# Altium PCB Tigershark 3D R1.1.PcbDoc (part 3 of 3)
Units mil, origin at the board's own origin, x right, y up, seen from the top; angles counter-clockwise.
Board outline 6000 x 4500 mil, 4 copper layers (Top Layer, Groun Plane, Power Plane, Bottom Layer); 257 components, 247 nets, 1024 pads, 791 vias.
Unrouted connection lines stored in the file: 159.
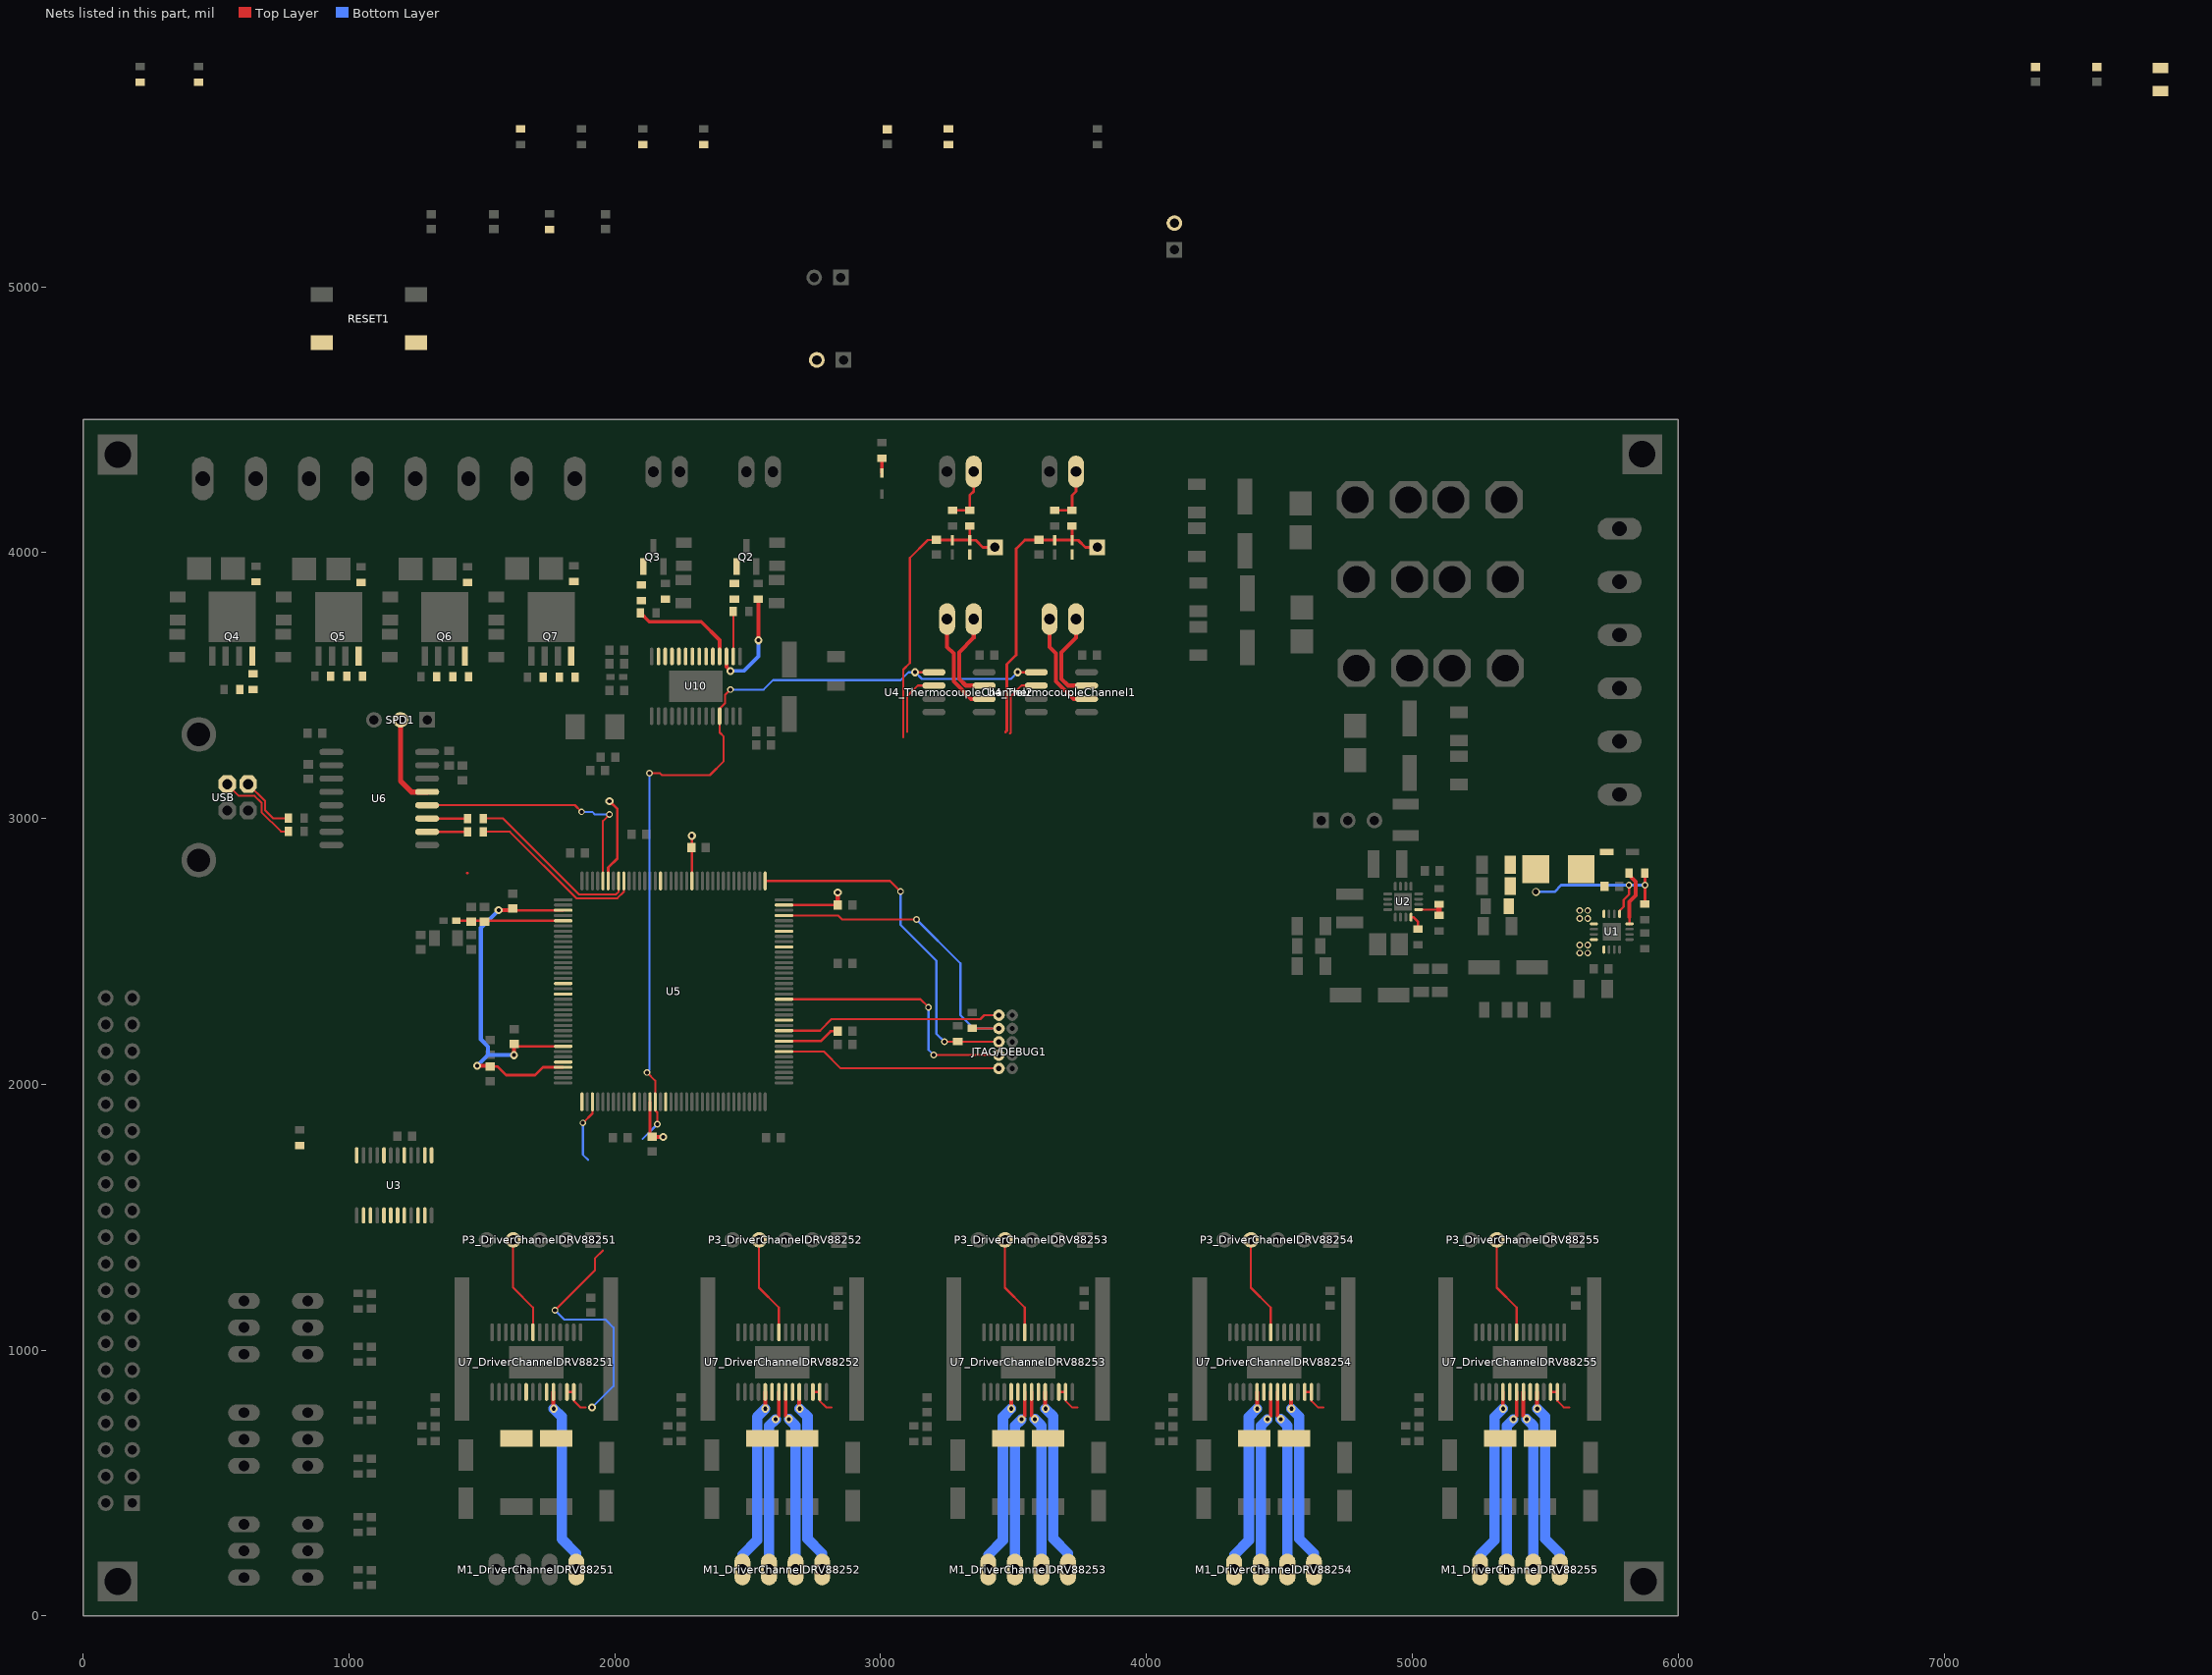
[diagram p5: the nets of this part, all layers, seen from the top]

## Via types
v1: diameter 30, hole 15, Top Layer to Bottom Layer, 501 vias
v2: diameter 25, hole 15, Top Layer to Bottom Layer, 177 vias
v3: diameter 19.68, hole 7.87, Top Layer to Bottom Layer, 90 vias
v4: diameter 50, hole 20, Top Layer to Bottom Layer, 19 vias
v5: diameter 30, hole 20, Top Layer to Bottom Layer, 3 vias
v6: diameter 50, hole 28, Top Layer to Bottom Layer, 1 vias

## Nets (pads, with @x,y where several pads share a name; then routed paths per layer and width w, separated by ;. In a path a pad name is that pad's centre, name@x,y a point inside that pad or via, vN(x,y) a via of type N, cw(c..) or ccw(c..) an arc to the next point about the centre after c; other vN are vias at no path point) (continued)
NetM1_DriverChannelDRV88251_4: M1_DriverChannelDRV88251.4 U7_DriverChannelDRV88251.10 | length 700
  Top Layer w14: v1@1768.98,782.98 U7_DriverChannelDRV88251.10@1768.98,842.8
  Bottom Layer w39: v1(1770,780) 1800,750 1800,290 1855,235 M1_DriverChannelDRV88251.4@1855,175
NetM1_DriverChannelDRV88252_1: M1_DriverChannelDRV88252.1 U7_DriverChannelDRV88252.5 | length 703.4
  Top Layer w14: v1(2566.02,780) U7_DriverChannelDRV88252.5@2566.02,842.8
  Bottom Layer w39: M1_DriverChannelDRV88252.1@2480,175 2480,230 2535,285 2535,748.98 v1(2566.02,780)
NetM1_DriverChannelDRV88252_2: M1_DriverChannelDRV88252.2 U7_DriverChannelDRV88252.7 | length 683.2
  Top Layer w14: v1(2605,740) 2617.2,752.2 U7_DriverChannelDRV88252.7@2617.2,842.8
  Bottom Layer w39: M1_DriverChannelDRV88252.2@2580,175 2580,715 v1(2605,740)
NetM1_DriverChannelDRV88252_3: M1_DriverChannelDRV88252.3 U7_DriverChannelDRV88252.8 | length 665.9
  Top Layer w14: 2642.8,753.23 U7_DriverChannelDRV88252.8@2642.8,842.8
  Bottom Layer w39: v1(2655,741.02) 2680,716.02 M1_DriverChannelDRV88252.3@2680,175
NetM1_DriverChannelDRV88252_4: M1_DriverChannelDRV88252.4 U7_DriverChannelDRV88252.10 | length 700
  Top Layer w14: v1@2693.98,782.98 U7_DriverChannelDRV88252.10@2693.98,842.8
  Bottom Layer w39: v1(2695,780) 2725,750 2725,290 2780,235 M1_DriverChannelDRV88252.4@2780,175
NetM1_DriverChannelDRV88253_1: M1_DriverChannelDRV88253.1 U7_DriverChannelDRV88253.5 | length 703.4
  Top Layer w14: v1(3491.02,780) U7_DriverChannelDRV88253.5@3491.02,842.8
  Bottom Layer w39: M1_DriverChannelDRV88253.1@3405,175 3405,230 3460,285 3460,748.98 v1(3491.02,780)
NetM1_DriverChannelDRV88253_2: M1_DriverChannelDRV88253.2 U7_DriverChannelDRV88253.7 | length 683.2
  Top Layer w14: v1(3530,740) 3542.2,752.2 U7_DriverChannelDRV88253.7@3542.2,842.8
  Bottom Layer w39: M1_DriverChannelDRV88253.2@3505,175 3505,715 v1(3530,740)
NetM1_DriverChannelDRV88253_3: M1_DriverChannelDRV88253.3 U7_DriverChannelDRV88253.8 | length 665.9
  Top Layer w14: 3567.8,753.23 U7_DriverChannelDRV88253.8@3567.8,842.8
  Bottom Layer w39: v1(3580,741.02) 3605,716.02 M1_DriverChannelDRV88253.3@3605,175
NetM1_DriverChannelDRV88253_4: M1_DriverChannelDRV88253.4 U7_DriverChannelDRV88253.10 | length 700
  Top Layer w14: v1@3618.98,782.98 U7_DriverChannelDRV88253.10@3618.98,842.8
  Bottom Layer w39: v1(3620,780) 3650,750 3650,290 3705,235 M1_DriverChannelDRV88253.4@3705,175
NetM1_DriverChannelDRV88254_1: M1_DriverChannelDRV88254.1 U7_DriverChannelDRV88254.5 | length 703.4
  Top Layer w14: v1(4416.02,780) U7_DriverChannelDRV88254.5@4416.02,842.8
  Bottom Layer w39: M1_DriverChannelDRV88254.1@4330,175 4330,230 4385,285 4385,748.98 v1(4416.02,780)
NetM1_DriverChannelDRV88254_2: M1_DriverChannelDRV88254.2 U7_DriverChannelDRV88254.7 | length 683.2
  Top Layer w14: v1(4455,740) 4467.2,752.2 U7_DriverChannelDRV88254.7@4467.2,842.8
  Bottom Layer w39: M1_DriverChannelDRV88254.2@4430,175 4430,715 v1(4455,740)
NetM1_DriverChannelDRV88254_3: M1_DriverChannelDRV88254.3 U7_DriverChannelDRV88254.8 | length 665.9
  Top Layer w14: 4492.8,753.23 U7_DriverChannelDRV88254.8@4492.8,842.8
  Bottom Layer w39: v1(4505,741.02) 4530,716.02 M1_DriverChannelDRV88254.3@4530,175
NetM1_DriverChannelDRV88254_4: M1_DriverChannelDRV88254.4 U7_DriverChannelDRV88254.10 | length 700
  Top Layer w14: v1@4543.98,782.98 U7_DriverChannelDRV88254.10@4543.98,842.8
  Bottom Layer w39: v1(4545,780) 4575,750 4575,290 4630,235 M1_DriverChannelDRV88254.4@4630,175
NetM1_DriverChannelDRV88255_1: M1_DriverChannelDRV88255.1 U7_DriverChannelDRV88255.5 | length 703.4
  Top Layer w14: v1(5341.02,780) U7_DriverChannelDRV88255.5@5341.02,842.8
  Bottom Layer w39: M1_DriverChannelDRV88255.1@5255,175 5255,230 5310,285 5310,748.98 v1(5341.02,780)
NetM1_DriverChannelDRV88255_2: M1_DriverChannelDRV88255.2 U7_DriverChannelDRV88255.7 | length 683.2
  Top Layer w14: v1(5380,740) 5392.2,752.2 U7_DriverChannelDRV88255.7@5392.2,842.8
  Bottom Layer w39: M1_DriverChannelDRV88255.2@5355,175 5355,715 v1(5380,740)
NetM1_DriverChannelDRV88255_3: M1_DriverChannelDRV88255.3 U7_DriverChannelDRV88255.8 | length 665.9
  Top Layer w14: 5417.8,753.23 U7_DriverChannelDRV88255.8@5417.8,842.8
  Bottom Layer w39: v1(5430,741.02) 5455,716.02 M1_DriverChannelDRV88255.3@5455,175
NetM1_DriverChannelDRV88255_4: M1_DriverChannelDRV88255.4 U7_DriverChannelDRV88255.10 | length 700
  Top Layer w14: v1@5468.98,782.98 U7_DriverChannelDRV88255.10@5468.98,842.8
  Bottom Layer w39: v1(5470,780) 5500,750 5500,290 5555,235 M1_DriverChannelDRV88255.4@5555,175
NetP2_ThermistorChannel1_1: P2_ThermistorChannel1.1 R13_ThermistorChannel1.1 R14_ThermistorChannel1.2 | length 216.7
  Top Layer w10: R13_ThermistorChannel1.1@3655,4159.53 R14_ThermistorChannel1.2@3720,4159.53 3720,4215 3735,4230 P2_ThermistorChannel1.1@3735,4305
NetP2_ThermistorChannel2_1: P2_ThermistorChannel2.1 R13_ThermistorChannel2.1 R14_ThermistorChannel2.2 | length 216.7
  Top Layer w10: R13_ThermistorChannel2.1@3270,4159.53 R14_ThermistorChannel2.2@3335,4159.53 3335,4215 3350,4230 P2_ThermistorChannel2.1@3350,4305
NetQ2_1: Q2.1 R45.2
NetQ3_1: Q3.1 R52.2
NetQ4_4: Q4.4 R58.2
NetQ5_4: Q5.4 R62.2
NetQ6_4: Q6.4 R66.2
NetQ7_4: Q7.4 R70.2
NetR12_1: R12.1 U2.4 | length 60.4
  Top Layer w10: U2.4@4994.98,2628.75 5003.52,2628.75 5021.45,2610.82 R12.1@5021.45,2584.35
NetR14_1: R14.1 U10.3 | length 402.8
  Top Layer w14: U10.3@2420,3609.41 2420,3570 v1(2435,3555) ; v1(2540,3670) R14.1@2540,3824.41
  Bottom Layer w14: v1(2435,3555) 2485,3555 2540,3610 v1(2540,3670)
NetR15_1: R15.1 R16.1 U5.129
NetR17_2: R17.2 U6.10 | length 151.4
  Top Layer w10: U6.10@1294.12,2950 R17.2@1445.47,2950
NetR18_2: R18.2 USB.2 | length 225.2
  Top Layer w8: USB.2@621,3129.21 685,3065.21 685,3030 714,3001 R18.2@772.47,3001
NetR19_2: R19.2 U6.11 | length 151.4
  Top Layer w10: U6.11@1294.12,3000 R19.2@1445.47,3000
NetR20_2: R20.2 USB.3 | length 325
  Top Layer w8: USB.3@542,3129.21 586.21,3085 645.41,3085 671,3059.41 671,3024 744,2951 R20.2@772.47,2951
NetR23_2: R23.2 R28.2 TRST1.2
NetR31_1: R31.1 U3.1 U3.12 U3.15 U3.18 U3.19 U3.22
NetR32_DriverChannelDRV88251_2: R32_DriverChannelDRV88251.2 U7_DriverChannelDRV88251.9
NetR32_DriverChannelDRV88252_2: R32_DriverChannelDRV88252.2 U7_DriverChannelDRV88252.9
NetR32_DriverChannelDRV88253_2: R32_DriverChannelDRV88253.2 U7_DriverChannelDRV88253.9
NetR32_DriverChannelDRV88254_2: R32_DriverChannelDRV88254.2 U7_DriverChannelDRV88254.9
NetR32_DriverChannelDRV88255_2: R32_DriverChannelDRV88255.2 U7_DriverChannelDRV88255.9
NetR33_DriverChannelDRV88251_2: R33_DriverChannelDRV88251.2 U7_DriverChannelDRV88251.6
NetR33_DriverChannelDRV88252_2: R33_DriverChannelDRV88252.2 U7_DriverChannelDRV88252.6
NetR33_DriverChannelDRV88253_2: R33_DriverChannelDRV88253.2 U7_DriverChannelDRV88253.6
NetR33_DriverChannelDRV88254_2: R33_DriverChannelDRV88254.2 U7_DriverChannelDRV88254.6
NetR33_DriverChannelDRV88255_2: R33_DriverChannelDRV88255.2 U7_DriverChannelDRV88255.6
NetR37_1: R37.1 R38.2 U2.5 | length 117.4
  Top Layer w8: U2.5@5023.52,2657.29 5099.98,2657.29
  Top Layer w20: R37.1@5100.45,2636.35 R38.2@5100.45,2677.29
NetR45_1: R45.1 R46.1 U10.2 | length 169.6
  Top Layer w8: R46.1@2445.47,3778.94 2445.59,3778.82 U10.2@2445.59,3609.41
NetR48_1: R48.1 U10.5
NetR52_1: R52.1 R55.1 U10.4 | length 402.9
  Top Layer w14: R55.1@2095.47,3773.94 2129.41,3740 2325,3740 2394.41,3670.59 U10.4@2394.41,3609.41
NetR57_1: R57.1 U10.7
NetR58_1: R58.1 R59.1 U10.6
NetR61_1: R61.1 U10.9
NetR62_1: R62.1 R63.1 U10.8
NetR65_1: R65.1 U10.11
NetR66_1: R66.1 R67.1 U10.10
NetR69_1: R69.1 U10.13
NetR70_1: R70.1 R71.1 U10.12
NetSPD1_2: SPD1.2 U6.13 | length 346.9
  Top Layer w20: SPD1.2@1194.12,3370.88 1194.12,3140.88 1235,3100 U6.13@1294.12,3100
NetT2_ThermocoupleChannel1_1: T2_ThermocoupleChannel1.1 U4_ThermocoupleChannel1.3 | length 351.9
  Top Layer w15: T2_ThermocoupleChannel1.1@3735,3750 3735,3679.49 3680.51,3625 3680.51,3525 3705.51,3500 U4_ThermocoupleChannel1.3@3774.49,3500
NetT2_ThermocoupleChannel1_2: T2_ThermocoupleChannel1.2 U4_ThermocoupleChannel1.2 | length 386.5
  Top Layer w15: T2_ThermocoupleChannel1.2@3635,3750 3635,3645.51 3659.51,3621 3659.51,3516 3725.51,3450 U4_ThermocoupleChannel1.2@3774.49,3450
NetT2_ThermocoupleChannel2_1: T2_ThermocoupleChannel2.1 U4_ThermocoupleChannel2.3 | length 351.9
  Top Layer w15: T2_ThermocoupleChannel2.1@3350,3750 3350,3679.49 3295.51,3625 3295.51,3525 3320.51,3500 U4_ThermocoupleChannel2.3@3389.49,3500
NetT2_ThermocoupleChannel2_2: T2_ThermocoupleChannel2.2 U4_ThermocoupleChannel2.2 | length 386.5
  Top Layer w15: T2_ThermocoupleChannel2.2@3250,3750 3250,3645.51 3274.51,3621 3274.51,3516 3340.51,3450 U4_ThermocoupleChannel2.2@3389.49,3450
NetU5_140: U5.140 U6.12 | length 960.6
  Top Layer w8: U6.12@1294.12,3050 1850,3050 v2(1875,3025) ; U5.140@1955.35,2765 1955.35,2990.35 v2(1980,3015)
  Bottom Layer w8: v2(1875,3025) 1915,3025 1925,3015 v2(1980,3015)
OVREF: D1.2 D11_ThermistorChannel1.2 D11_ThermistorChannel2.2 R1.1 | length 56.1
  Top Layer w12: D1.2@3005,4299.37 R1.1@3005,4355.47
PG: R9.2 U1.8 | length 214
  Top Layer w10: U1.8@5816.93,2603.53 5816.93,2629
  Top Layer w15: 5816.93,2629 5816.93,2685.93 5841,2710 5841,2763 5816.93,2787.07 R9.2@5816.93,2797.54
POT_CS: U3.5 U5.39 | length 242.5
  Top Layer w8: v2(1880,1855) 1915.98,1890.98 U5.39@1915.98,1934.29
  Bottom Layer w8: v2(1880,1855) 1880,1735 1900,1715
REF1: U3.2 U7_DriverChannelDRV88251.12 U7_DriverChannelDRV88251.13 | length 993.1
  Top Layer w8: v2(1775,1150) 1925,1300 1925,1345 1955,1375 ; U7_DriverChannelDRV88251.12@1820.16,842.8 U7_DriverChannelDRV88251.13@1845.75,842.8 1845.75,809.25 1870,785 1890,785
  Bottom Layer w8: v2(1775,1150) 1810,1115 1965,1115 1995,1085 1995,865 v1(1915,785)
REF2: U3.23 U7_DriverChannelDRV88252.12 U7_DriverChannelDRV88252.13 | length 113.4
  Top Layer w8: U7_DriverChannelDRV88252.12@2745.16,842.8 U7_DriverChannelDRV88252.13@2770.75,842.8 2770.75,809.25 2795,785 2815,785
REF3: U3.20 U7_DriverChannelDRV88253.12 U7_DriverChannelDRV88253.13 | length 113.4
  Top Layer w8: U7_DriverChannelDRV88253.12@3670.16,842.8 U7_DriverChannelDRV88253.13@3695.75,842.8 3695.75,809.25 3720,785 3740,785
REF4: U3.17 U7_DriverChannelDRV88254.12 U7_DriverChannelDRV88254.13 | length 113.4
  Top Layer w8: U7_DriverChannelDRV88254.12@4595.16,842.8 U7_DriverChannelDRV88254.13@4620.75,842.8 4620.75,809.25 4645,785 4665,785
REF5: U3.14 U7_DriverChannelDRV88255.12 U7_DriverChannelDRV88255.13 | length 113.4
  Top Layer w8: U7_DriverChannelDRV88255.12@5520.16,842.8 U7_DriverChannelDRV88255.13@5545.75,842.8 5545.75,809.25 5570,785 5590,785
REF_EXP1: U5.53
REF_EXP2: U5.47
RESET: C63.2 JTAG/DEBUG1.10 kRESET.2 R21.1 RESET1.1 U5.83 | length 832.6
  Top Layer w8: U5.83@2636.46,2202.01 2772.01,2202.01 2815,2245 3375,2245 3390,2260 JTAG/DEBUG1.10@3445,2260
RXD1: U5.32
SCLK: U3.8 U4_ThermocoupleChannel1.5 U4_ThermocoupleChannel2.5 U5.51 U10.25 | length 3283.6
  Top Layer w8: v2(2121.1,2044.65) 2152.2,2013.54 U5.51@2152.2,1934.29 2152.2,1901.95 2160,1894.16 v2(2160,1850) ; v2(2130,3170) 2170.2,3170 2177.43,3162.77 2357.37,3162.77 2409.84,3215.24 2409.84,3308.27 2394.41,3323.7 U10.25@2394.41,3385 2394.41,3413.57 2414.84,3434.01 2414.84,3464.53 v2(2435.16,3484.84) ; v1(3130,3550) U4_ThermocoupleChannel2.5@3200.51,3550 ; v1(3515,3550) U4_ThermocoupleChannel1.5@3585.51,3550
  Bottom Layer w8: 2105,1795 v2(2160,1850) ; v2(2121.1,2044.65) 2130,2053.54 v2(2130,3170) ; v2(2435.16,3484.84) 2560.04,3484.84 2595.2,3520 3075,3520 3105,3550 v1(3130,3550) 3155,3525 3490,3525 v1(3515,3550)
STEP1: P3_DriverChannelDRV88251.4 U7_DriverChannelDRV88251.22 | length 378.9
  Top Layer w8: P3_DriverChannelDRV88251.4@1618,1415 1617.5,1414.5 1617.5,1235 1692.2,1160.3 U7_DriverChannelDRV88251.22@1692.2,1067.2
STEP2: P3_DriverChannelDRV88252.4 U7_DriverChannelDRV88252.22 | length 378.9
  Top Layer w8: P3_DriverChannelDRV88252.4@2543,1415 2542.5,1414.5 2542.5,1235 2617.2,1160.3 U7_DriverChannelDRV88252.22@2617.2,1067.2
STEP3: P3_DriverChannelDRV88253.4 U7_DriverChannelDRV88253.22 | length 378.9
  Top Layer w8: P3_DriverChannelDRV88253.4@3468,1415 3467.5,1414.5 3467.5,1235 3542.2,1160.3 U7_DriverChannelDRV88253.22@3542.2,1067.2
STEP4: P3_DriverChannelDRV88254.4 U7_DriverChannelDRV88254.22 | length 378.9
  Top Layer w8: P3_DriverChannelDRV88254.4@4393,1415 4392.5,1414.5 4392.5,1235 4467.2,1160.3 U7_DriverChannelDRV88254.22@4467.2,1067.2
STEP5: P3_DriverChannelDRV88255.4 U7_DriverChannelDRV88255.22 | length 378.9
  Top Layer w8: P3_DriverChannelDRV88255.4@5318,1415 5317.5,1414.5 5317.5,1235 5392.2,1160.3 U7_DriverChannelDRV88255.22@5392.2,1067.2
SW: C7.1 D5.2 L1.1 U1.1 U1.12 U1.13 U1.16
  other v2: 5630,2494 5660,2494 5630,2524 5660,2524 5630,2624 5660,2624 5630,2654 5660,2654
SW_OUT: C8.2 C29.1 FB2.1 L1.2 R7.2 R9.1 U1.9 | length 668.1
  Top Layer w8: U1.9@5779.53,2640.93 5779.53,2652.31 5795,2667.79 5795,2694 5815,2714 v2(5815,2749)
  Top Layer w10: R7.2@5875,2673.53 v2(5875,2749) R9.1@5875,2798.53
  Bottom Layer w10: v5(5465,2724) 5535,2724 5560,2749 v2(5875,2749)
TC_CS1: U4_ThermocoupleChannel1.6 U5.99 | length 254.7
  Top Layer w8: 3485.61,3319.39 3490,3323.79 3490,3460.36 3529.64,3500 U4_ThermocoupleChannel1.6@3585.51,3500
TC_CS2: U4_ThermocoupleChannel2.6 U5.102 | length 252.1
  Top Layer w8: 3100,3325 3100,3460 3140,3500 U4_ThermocoupleChannel2.6@3200.51,3500
TCK/SWDCLK: JTAG/DEBUG1.4 R25.1 U5.89 | length 989.3
  Top Layer w8: U5.89@2636.46,2320.12 3149.88,2320.12 v2(3180,2290) ; v2(3200,2110) JTAG/DEBUG1.4@3445,2110
  Bottom Layer w8: v2(3180,2290) 3180,2130 v2(3200,2110)
TDI: JTAG/DEBUG1.8 R27.1 U5.105 | length 1198.4
  Top Layer w8: U5.105@2636.46,2635.08 2839.92,2635.08 2855,2620 v2(3135,2620) ; R27.1@3345.47,2210 JTAG/DEBUG1.8@3445,2210
  Bottom Layer w8: v2(3135,2620) 3300,2455 3300,2260 3350,2210 JTAG/DEBUG1.8@3445,2210
TDO/SWO: JTAG/DEBUG1.6 R26.1 U5.109 | length 1364.3
  Top Layer w8: U5.109@2565.59,2765 3035,2765 v2(3075,2725) ; v2(3240,2160) JTAG/DEBUG1.6@3445,2160
  Bottom Layer w8: v2(3075,2725) 3075,2600 3210,2465 3210,2190 v2(3240,2160)
THERM_AN1: C30_ThermistorChannel1.2 D11_ThermistorChannel1.1 D12_ThermistorChannel1.2 R14_ThermistorChannel1.1 THM_TP1_ThermistorChannel1.1 U5.17 | length 1089
  Top Layer w10: 3470,3325 3475,3330 3475,3580 3510,3615 3510,4015 3542.56,4047.56 C30_ThermistorChannel1.2@3595,4047.56 D11_ThermistorChannel1.1@3719.02,4047.56 ; R14_ThermistorChannel1.1@3720,4100.47 D11_ThermistorChannel1.1@3720,4046.57 3743.43,4046.57 3770,4020 THM_TP1_ThermistorChannel1.1@3815,4020
THERM_AN2: C30_ThermistorChannel2.2 D11_ThermistorChannel2.1 D12_ThermistorChannel2.2 R14_ThermistorChannel2.1 THM_TP1_ThermistorChannel2.1 U5.19 | length 1097.3
  Top Layer w8: 3085,3305 3085,3560 3110,3585 3110,3980 3177.56,4047.56 C30_ThermistorChannel2.2@3210,4047.56
  Top Layer w10: C30_ThermistorChannel2.2@3210,4047.56 D11_ThermistorChannel2.1@3334.02,4047.56 ; R14_ThermistorChannel2.1@3335,4100.47 D11_ThermistorChannel2.1@3335,4046.57 3358.43,4046.57 3385,4020 THM_TP1_ThermistorChannel2.1@3430,4020
TMS/SWDIO: JTAG/DEBUG1.2 R24.1 U5.79 | length 834.7
  Top Layer w8: U5.79@2636.46,2123.27 2786.73,2123.27 2850,2060 JTAG/DEBUG1.2@3445,2060
TRST: R23.1 U5.85
TXD1: U5.37
UDM_N: R19.1 U5.137 | length 673.4
  Top Layer w8: R19.1@1504.53,3000 1580,3000 1866,2714 2004.2,2714 2014.41,2724.21 U5.137@2014.41,2765
UDP_P: R17.1 U5.136 | length 684
  Top Layer w8: R17.1@1504.53,2950 1605,2950 1855,2700 2010,2700 2034.09,2724.09 U5.136@2034.09,2765
VDDIN: C54.2 C55.2 FB5.2 U5.5 | length 402.3
  Top Layer w8: FB5.2@1403.62,2615 1404.02,2615.39 U5.5@1805.75,2615.39
VDDOUT: C36.2 C37.2 C38.2 C39.2 C40.2 C41.2 C42.2 FB4.1 U5.3 U5.29 U5.33 U5.50 U5.81 U5.107 U5.123 | length 2394.6
  Top Layer w10: C39.2@1531.1,2067.2 1558.54,2067.2 1591.1,2034.65 1699.89,2034.65 1729.46,2064.21 U5.33@1805.75,2064.21 ; C42.2@1610.35,2142.95 1621.1,2142.95 U5.29@1805.75,2142.95 ; C38.2@1610.35,2654.76 U5.3@1805.75,2654.76 ; C41.2@2132.52,1799.65 U5.50@2132.52,1934.29 ; U5.123@2290,2765 v1(2290,2935) ; U5.81@2636.46,2162.64 2774.09,2162.64 2811.1,2199.65 C36.2@2838.54,2199.65 ; U5.107@2636.46,2674.45 C40.2@2831.85,2674.45
  Top Layer w15: v1(1482.8,2069.21) C39.2@1530.35,2069.21 ; v1(1562.8,2654.76) C38.2@1610.35,2654.76 ; v1(1621.1,2109.65) C42.2@1621.1,2142.95 ; C42.2@1621.1,2152.09 C42.2@1621.1,2142.95 ; C42.2@1621.1,2157.2 C42.2@1621.1,2142.95 ; C41.2@2135,1802.56 v1(2182.56,1802.56) ; C40.2@2838.54,2674.65 v1(2838.54,2722.2)
  Bottom Layer w15: v1(1482.8,2069.21) 1523.23,2109.65 ; v1(1562.8,2654.76) 1496.1,2588.07 1496.1,2169.65 1523.23,2142.52 1523.23,2109.65 ; v1(1621.1,2109.65) 1523.23,2109.65
VDDPLL: C32.2 C33.2 FB4.2 U5.139 | length 326.9
  Top Layer w10: U5.139@1975.04,2765 1975.04,2815.04 2010,2850 2010,3035 v1(1980,3065)
pads on no net: JTAG/DEBUG1.1@3526.5,1984.41 JTAG/DEBUG1.7 R22.1 U1.6 U1.7 U3.11 U4_ThermocoupleChannel1.8 U4_ThermocoupleChannel2.8 U5.1 U5.2 U5.7 U5.10 U5.11 U5.12 U5.13 U5.14 U5.15 U5.16 U5.18 U5.20 U5.21 U5.26 U5.27 U5.28 U5.31 U5.34 U5.35 U5.40 U5.41 U5.46 U5.48 U5.54 U5.56 U5.58 U5.59 U5.62 U5.66 U5.67 U5.69 U5.70 U5.71 U5.73 U5.74 U5.75 U5.76 U5.78 U5.82 U5.84 U5.86 U5.88 U5.90 U5.92 U5.93 U5.94 U5.97 U5.98 U5.100 U5.101 U5.103 U5.106 U5.108 U5.110 U5.111 U5.112 U5.113 U5.114 U5.116 U5.117 U5.118 U5.119 U5.120 U5.121 U5.122 U5.124 U5.125 U5.126 U5.127 U5.128 U5.130 U5.131 U5.132 U5.133 U5.144 U7_DriverChannelDRV88251.18 U7_DriverChannelDRV88251.19 U7_DriverChannelDRV88251.23 U7_DriverChannelDRV88251.27 U7_DriverChannelDRV88252.18 U7_DriverChannelDRV88252.19 U7_DriverChannelDRV88252.23 U7_DriverChannelDRV88252.27 U7_DriverChannelDRV88253.18 U7_DriverChannelDRV88253.19 U7_DriverChannelDRV88253.23 U7_DriverChannelDRV88253.27 U7_DriverChannelDRV88254.18 U7_DriverChannelDRV88254.19 U7_DriverChannelDRV88254.23 U7_DriverChannelDRV88254.27 U7_DriverChannelDRV88255.18 U7_DriverChannelDRV88255.19 U7_DriverChannelDRV88255.23 U7_DriverChannelDRV88255.27
copper on no net: | length 49.5
  Bottom Layer w8: 2815,880 2850,845

## Polygon pours and split planes (outlines as drawn)
GND on Top Layer "Top Layer-No Net" (solid, remove dead copper, pour order 109): 5118.45,2884.82 4991.45,2884.82 4991.45,2829.82 5077.45,2829.82 5077.45,2722.82 4997.45,2722.82 4997.45,2668.82 5046.45,2668.82 5046.45,2697.82 5118.45,2697.82
GND on Top Layer "Top Layer-No Net" (solid, remove dead copper, pour order 107): 4935.45,2682.82 4935.45,2652.82 4704.45,2652.82 4704.45,2886.82 4880.45,2886.82 4880.45,2770.82 4839.45,2770.82 4839.45,2682.82
NetC24_2 on Top Layer "Top Layer-No Net" (solid, remove dead copper, pour order 108): 5000.45,2731.82 4990.45,2731.82 4990.45,2756.82 4990.45,2821.82 5065.45,2821.82 5065.45,2781.82 5000.45,2781.82
NetL2_1 on Top Layer "Top Layer-No Net" (solid, remove dead copper, pour order 106): 4983.45,2644.82 4927.45,2644.82 4927.45,2486.82 4983.45,2486.82
SW on Top Layer "Mechanical 15-No Net" (solid, pour order 73): 17 vertices, not listed, extent 5580,2599 5765,2894
+12VCC1 on Top Layer "Mechanical 15-No Net" (solid, remove dead copper, pour order 72): 5730,2619 5750,2619 5750,2654 5760,2654 5760,2719 5720,2719 5720,2654 5730,2654
GND on Top Layer "Mechanical 15-No Net" (solid, pour order 89): 5710,2559 5710,2589 5570,2589 5570,2314 5665,2314 5665,2404 5700,2404 5700,2469 5605,2469 5605,2559
SW on Top Layer "Mechanical 15-No Net" (solid, pour order 82): 5725,2474 5725,2539 5710,2539 5710,2549 5610,2549 5610,2474
+12VCC1 on Top Layer "Mechanical 15-No Net" (solid, pour order 71): 5735,2529 5765,2529 5765,2469 5875,2469 5875,2319 5710,2319 5710,2404 5720,2404 5720,2469 5735,2469
NetR32_DriverChannelDRV88251_2 on Top Layer "Mechanical 15-No Net" (solid, remove dead copper, pour order 88): 1844,645 1716.28,645 1716.28,730 1736,730 1736,864 1749,864 1749,780 1844,718
NetR33_DriverChannelDRV88251_2 on Top Layer "Mechanical 15-No Net" (solid, remove dead copper, pour order 80): 1567,645 1695,645 1695,720 1673,720 1673,754.96 1673.01,861 1661,861 1661,770 1567,721
NetC22_1 on Top Layer "Top Layer-No Net" (solid, remove dead copper, pour order 105): 4982.45,2912.55 4983.45,2728.82 4928.45,2728.82 4928.45,2710.82 4889.45,2710.82 4889.45,2761.82 4938.45,2761.82 4937.45,2912.55 4917.45,2912.55 4917.45,2957.55 5027.45,2957.55 5027.45,2912.55
+12VCC3 on Top Layer "Top Layer-No Net" (solid, remove dead copper, pour order 116): 18 vertices, not listed, extent 3880,3564 5080,3990.39
NetF2_1 on Top Layer "Top Layer-No Net" (solid, remove dead copper, pour order 112): 5085,4304 5085,4009 5970,4009 5970,4224 5745,4224 5745,4304
NetF1_1 on Top Layer "Top Layer-No Net" (solid, remove dead copper, pour order 115): 5970,3584 5970,4004 5075,4004 5075,3674 5500,3674 5500,3584
NetF3_1 on Top Layer "Top Layer-No Net" (solid, remove dead copper, pour order 119): 5955,3184 5955,3574 5490,3574 5490,3669 5080,3669 5080,3469 5260,3469 5260,3359 5445,3359 5445,3299 5500,3299 5500,3184
+12VCC1 on Top Layer "Top Layer-No Net" (solid, remove dead copper, pour order 99): 1900,715 2150,715 2150,240 1970,240 1970,285 2025,285 2025,530 1900,530
+12VCC1 on Top Layer "Top Layer-No Net" (solid, remove dead copper, pour order 98): 3750,715 4000,715 4000,240 3820,240 3820,285 3875,285 3875,530 3750,530
NetR33_DriverChannelDRV88253_2 on Top Layer "Mechanical 15-No Net" (solid, remove dead copper, pour order 79): 3417,645 3545,645 3545,720 3523,720 3523,754.96 3523.01,861 3511,861 3511,770 3417,721
NetR32_DriverChannelDRV88253_2 on Top Layer "Mechanical 15-No Net" (solid, remove dead copper, pour order 87): 3694,645 3566.28,645 3566.28,730 3586,730 3586,864 3599,864 3599,780 3694,718
+12VCC1 on Top Layer "Top Layer-No Net" (solid, remove dead copper, pour order 97): 2825,715 3075,715 3075,240 2895,240 2895,285 2950,285 2950,530 2825,530
NetR33_DriverChannelDRV88252_2 on Top Layer "Mechanical 15-No Net" (solid, remove dead copper, pour order 77): 2492,645 2620,645 2620,720 2598,720 2598,754.96 2598.01,861 2586,861 2586,770 2492,721
NetR32_DriverChannelDRV88252_2 on Top Layer "Mechanical 15-No Net" (solid, remove dead copper, pour order 86): 2769,645 2641.28,645 2641.28,730 2661,730 2661,864 2674,864 2674,780 2769,718
+12VCC1 on Top Layer "Top Layer-No Net" (solid, remove dead copper, pour order 96): 5600,715 5850,715 5850,240 5670,240 5670,285 5725,285 5725,530 5600,530
NetR33_DriverChannelDRV88255_2 on Top Layer "Mechanical 15-No Net" (solid, remove dead copper, pour order 76): 5267,645 5395,645 5395,720 5373,720 5373,754.96 5373.01,861 5361,861 5361,770 5267,721
NetR32_DriverChannelDRV88255_2 on Top Layer "Mechanical 15-No Net" (solid, remove dead copper, pour order 85): 5544,645 5416.28,645 5416.28,730 5436,730 5436,864 5449,864 5449,780 5544,718
+12VCC1 on Top Layer "Top Layer-No Net" (solid, remove dead copper, pour order 95): 4675,715 4925,715 4925,240 4745,240 4745,285 4800,285 4800,530 4675,530
NetR33_DriverChannelDRV88254_2 on Top Layer "Mechanical 15-No Net" (solid, remove dead copper, pour order 74): 4342,645 4470,645 4470,720 4448,720 4448,754.96 4448.01,861 4436,861 4436,770 4342,721
NetR32_DriverChannelDRV88254_2 on Top Layer "Mechanical 15-No Net" (solid, remove dead copper, pour order 83): 4619,645 4491.28,645 4491.28,730 4511,730 4511,864 4524,864 4524,780 4619,718
SW_OUT on Top Layer "Top Layer-No Net" (solid, remove dead copper, pour order 62): 5340,2865 5520,2865 5520,2755 5405,2755 5405,2790 5395,2790 5395,2640 5340,2640
3.3VCC on Top Layer "Top Layer-No Net" (solid, remove dead copper, pour order 65): 4625,2550 4625,2400 4540,2400 4540,2300 4815,2300 4815,2415 5065,2415 5065,2470 4700,2470 4700,2550
+12VCC1 on Top Layer "Top Layer-No Net" (solid, remove dead copper, pour order 117): 21 vertices, not listed, extent 4675,2935 5470,3654
+5VCC on Top Layer "Top Layer-No Net" (solid, remove dead copper, pour order 63): 5325,2250 5145,2250 5145,2420 5205,2420 5205,2700 5325,2700
+12VCC2 on Top Layer "Top Layer-No Net" (solid, remove dead copper, pour order 113): 17 vertices, not listed, extent 3880,3918 5065,4400
+12VCC3 on Top Layer "Top Layer-No Net" (solid, remove dead copper, pour order 61): 510,4460 325,4460 325,3815 465,3815 465,3890 510,3890 510,4460
+12VCC2 on Top Layer "Top Layer-No Net" (solid, remove dead copper, pour order 75): 910,4460 725,4460 725,3815 865,3815 865,3890 910,3890 910,4460
+12VCC2 on Top Layer "Top Layer-No Net" (solid, remove dead copper, pour order 78): 1310,4460 1125,4460 1125,3815 1265,3815 1265,3890 1310,3890 1310,4460
+12VCC2 on Top Layer "Top Layer-No Net" (solid, remove dead copper, pour order 81): 1710,4460 1525,4460 1525,3815 1665,3815 1665,3890 1710,3890 1710,4460
NetC4_1 on Top Layer "Top Layer-No Net" (solid, remove dead copper, pour order 110): 4906.45,2480.82 4906.45,2572.82 4876.45,2572.82 4876.45,2633.82 4704.45,2633.82 4595,2635 4595,2555 4540,2555 4540,2485 4625,2485 4625,2560 4705,2560 4704.45,2480.82
+12VCC2 on Top Layer "Top Layer-No Net" (solid, remove dead copper, pour order 84): 2465,3665 2465,3525 2470,3530 2925,3530 2925,3665
NetD12_1 on Top Layer "Top Layer-No Net" (solid, remove dead copper, pour order 70): 17 vertices, not listed, extent 320,3575 700,4460
NetD14_1 on Top Layer "Top Layer-No Net" (solid, remove dead copper, pour order 69): 17 vertices, not listed, extent 720,3575 1100,4460
NetD16_1 on Top Layer "Top Layer-No Net" (solid, remove dead copper, pour order 68): 17 vertices, not listed, extent 1120,3575 1500,4460
NetD18_1 on Top Layer "Top Layer-No Net" (solid, remove dead copper, pour order 67): 17 vertices, not listed, extent 1520,3575 1900,4460
+12VCC1 on Top Layer "Top Layer-No Net" (solid, remove dead copper, pour order 104): 1250,240 1375,240 1375,530 1510,530 1510,715 1445,715 1445,675 1250,675
+12VCC1 on Top Layer "Top Layer-No Net" (solid, remove dead copper, pour order 103): 2175,240 2300,240 2300,530 2435,530 2435,715 2370,715 2370,675 2175,675
+12VCC1 on Top Layer "Top Layer-No Net" (solid, remove dead copper, pour order 102): 3100,240 3225,240 3225,530 3360,530 3360,715 3295,715 3295,675 3100,675
+12VCC1 on Top Layer "Top Layer-No Net" (solid, remove dead copper, pour order 101): 4025,240 4150,240 4150,530 4285,530 4285,715 4220,715 4220,675 4025,675
+12VCC1 on Top Layer "Top Layer-No Net" (solid, remove dead copper, pour order 100): 4950,240 5075,240 5075,530 5210,530 5210,715 5145,715 5145,675 4950,675
GND on Top Layer "Top Layer-No Net" (solid, remove dead copper, pour order 94): 19 vertices, not listed, extent 2175,810 3075,1280
GND on Top Layer "Top Layer-No Net" (solid, remove dead copper, pour order 93): 19 vertices, not listed, extent 3100,810 4000,1280
GND on Top Layer "Top Layer-No Net" (solid, remove dead copper, pour order 92): 19 vertices, not listed, extent 4020,805 4920,1275
GND on Top Layer "Top Layer-No Net" (solid, remove dead copper, pour order 91): 19 vertices, not listed, extent 4950,810 5850,1280
GND on Top Layer "Top Layer-No Net" (solid, remove dead copper, pour order 90): 19 vertices, not listed, extent 1250,810 2150,1280
+12VCC1 on Bottom Layer "Mechanical 15-No Net" (solid, pour order 64): 5751.79,2404 5751.79,2464 5800,2464 5800,2654 5725,2654 5725,2719 5875,2719 5875,2404
SW on Bottom Layer "Mechanical 15-No Net" (solid, pour order 66): 5690,2674 5690,2474 5610,2474 5610,2674
NetF2_1 on Bottom Layer "Top Layer-No Net" (solid, remove dead copper, pour order 111): 5085,4303 5085,4008 5970,4008 5970,4223 5745,4223 5745,4303
NetF1_1 on Bottom Layer "Top Layer-No Net" (solid, remove dead copper, pour order 114): 5970.22,3584 5970.22,4004 5075.22,4004 5075.22,3674 5500.22,3674 5500.22,3584
NetF3_1 on Bottom Layer "Top Layer-No Net" (solid, remove dead copper, pour order 118): 5955,3184 5955,3574 5490,3574 5490,3669 5080,3669 5080,3469 5260,3469 5260,3359 5445,3359 5445,3299 5500,3299 5500,3184
INPUT_GND on Groun Plane (split plane): 1019.9,3297.89 1019.9,2755.1 20.1,2755.1 20.1,3414.9 902.89,3414.9
GND on Groun Plane (split plane): 19 vertices, not listed, extent 20.1,20.1 5979.9,4479.9
3.3VCC on Power Plane (split plane): 57 vertices, not listed, extent 4933.29,3502.29 5056.71,3625.71
+5VCC on Power Plane (split plane): 5564.9,2245.1 5130.1,2245.1 5130.1,2417.89 5148.6,2436.4 5149.71,2438.05 5150.1,2440 5150.1,2928.9 5564.9,2928.9
3.3VCC on Power Plane (split plane): 57 vertices, not listed, extent 4928.29,3837.29 5051.71,3960.71
3.3VCC on Power Plane (split plane): 5754.9,2662.1 5725.1,2662.1 5725.1,2715.9 5754.9,2715.9
3.3VCC on Power Plane (split plane): 49 vertices, not listed, extent 5430.98,2689.98 5499.02,2758.02
3.3VCC on Power Plane (split plane): 57 vertices, not listed, extent 4923.29,4137.29 5046.71,4260.71
3.3VCC on Power Plane (split plane): 57 vertices, not listed, extent 4723.29,4137.29 4846.71,4260.71
3.3VCC on Power Plane (split plane): 57 vertices, not listed, extent 4733.29,3502.29 4856.71,3625.71
3.3VCC on Power Plane (split plane): 57 vertices, not listed, extent 4728.29,3837.29 4851.71,3960.71
3.3VCC on Power Plane (split plane): 49 vertices, not listed, extent 5512.01,727.01 5587.99,802.99
3.3VCC on Power Plane (split plane): 49 vertices, not listed, extent 5222.01,732.01 5297.99,807.99
3.3VCC on Power Plane (split plane): 49 vertices, not listed, extent 5582.01,657.01 5657.99,732.99
3.3VCC on Power Plane (split plane): 49 vertices, not listed, extent 5142.01,657.01 5217.99,732.99
3.3VCC on Power Plane (split plane): 49 vertices, not listed, extent 4587.01,727.01 4662.99,802.99
3.3VCC on Power Plane (split plane): 49 vertices, not listed, extent 4297.01,732.01 4372.99,807.99
3.3VCC on Power Plane (split plane): 49 vertices, not listed, extent 4657.01,657.01 4732.99,732.99
3.3VCC on Power Plane (split plane): 49 vertices, not listed, extent 4217.01,657.01 4292.99,732.99
+12VCC2 on Power Plane (split plane): 5979.9,4070.1 570.1,4070.1 570.1,4479.9 5979.9,4479.9
+12VCC3 on Power Plane (split plane): 31 vertices, not listed, extent 20.1,3190.1 4424.9,4479.9
3.3VCC on Power Plane (split plane): 49 vertices, not listed, extent 3662.01,727.01 3737.99,802.99
3.3VCC on Power Plane (split plane): 49 vertices, not listed, extent 3372.01,732.01 3447.99,807.99
3.3VCC on Power Plane (split plane): 49 vertices, not listed, extent 2447.01,732.01 2522.99,807.99
3.3VCC on Power Plane (split plane): 49 vertices, not listed, extent 1522.01,732.01 1597.99,807.99
3.3VCC on Power Plane (split plane): 49 vertices, not listed, extent 2737.01,727.01 2812.99,802.99
3.3VCC on Power Plane (split plane): 49 vertices, not listed, extent 1812.01,727.01 1887.99,802.99
+12VCC1 on Power Plane (split plane): 18 vertices, not listed, extent 1230.1,20.1 5979.9,3423.9
3.3VCC on Power Plane (split plane): 54 vertices, not listed, extent 20.1,20.1 5979.9,4059.9
3.3VCC on Power Plane (split plane): 49 vertices, not listed, extent 3732.01,657.01 3807.99,732.99
3.3VCC on Power Plane (split plane): 49 vertices, not listed, extent 3292.01,657.01 3367.99,732.99
3.3VCC on Power Plane (split plane): 49 vertices, not listed, extent 1882.01,657.01 1957.99,732.99
3.3VCC on Power Plane (split plane): 49 vertices, not listed, extent 1442.01,657.01 1517.99,732.99
3.3VCC on Power Plane (split plane): 49 vertices, not listed, extent 2807.01,657.01 2882.99,732.99
3.3VCC on Power Plane (split plane): 49 vertices, not listed, extent 2367.01,657.01 2442.99,732.99

## Keep-outs
Keep-Out Layer:
  lines w10: 25,25 5975,25 5975,4475 25,4475 25,25

## Other copper
Groun Plane (plane layer: these items are gaps in the copper):
  lines w10: 0,2750 1025,2750 1025,3300 905,3420 0,3420
Power Plane (plane layer: these items are gaps in the copper):
  circle w10: c1480,695 r43.01
  circle w10: c1560,770 r43.01
  circle w10: c1850,765 r43.01
  circle w10: c1920,695 r43.01
  circle w10: c2845,695 r43.01
  circle w10: c2775,765 r43.01
  circle w10: c2485,770 r43.01
  circle w10: c2405,695 r43.01
  circle w10: c3770,695 r43.01
  circle w10: c3700,765 r43.01
  circle w10: c3410,770 r43.01
  circle w10: c3330,695 r43.01
  circle w10: c4695,695 r43.01
  circle w10: c4625,765 r43.01
  circle w10: c4335,770 r43.01
  circle w10: c4255,695 r43.01
  circle w10: c5620,695 r43.01
  circle w10: c5550,765 r43.01
  circle w10: c5260,770 r43.01
  circle w10: c5180,695 r43.01
  circle w10: c5465,2724 r39.05
  circle w10: c4785,4199 r66.71
  circle w10: c4985,4199 r66.71
  circle w10: c4990,3899 r66.71
  circle w10: c4790,3899 r66.71
  circle w10: c4995,3564 r66.71
  circle w10: c4795,3564 r66.71
  lines w10: -5,3665 2490,3665 2490,3545 2765,3545 3005,3545 3005,3665 3760,3665 3850,3575 3850,3185 4430,3185 4430,4065 3785,4065 565,4065 565,4490 555,4500 ; 1225,0 1225,1025 5570,1025 5570,2934 5145,2934 ; 4425,4065 5995,4065 ; 5570,2240 5125,2240 5125,2420 5145,2440 5145,2934 ; 6005,3429 5145,3429 5145,2934 ; 5720,2657 5720,2721 5760,2721 5760,2657 5720,2657

## Silkscreen, mask and mechanical layers (free items; w line width, h text height)
Top Overlay:
  lines w6: 325,4130 325,4025 750,4025 ; 750,4125 750,4025 ; 1150,4130 1150,4025 ; 1550,4130 1550,4025 ; 1975,4130 1975,4025 1550,4025 ; 5630,2965 5480,2965 5480,3390 ; 5630,3390 5480,3390 ; 5630,3790 5480,3790 ; 5630,4215 5480,4215 5480,3790 ; 750,4025 1150,4025 ; 1150,4025 1550,4025 ; 5480,3390 5480,3790
  lines w10: 275,455 1150,455 ; 275,875 1150,875 ; 275,1325 275,25 1150,25 1150,1325 ; 275,1325 1150,1325 ; 275,1325 275,1425 1150,1425 1150,1325 ; 40,40 195,40 220,40 220,220 40,220 40,40 ; 40,4278.94 195,4278.94 220,4278.94 220,4458.94 40,4458.94 40,4278.94 ; 5775,4280 5930,4280 5955,4280 5955,4460 5775,4460 5775,4280 ; 5780,40 5780,220 5960,220 5960,195 5960,40 5780,40
  text "MOSFETS" at 4665,4314 h120
  text "FAN-0" at 2040,4100 h120
  text "FAN-1" at 2390,4100 h120
  text "HEAT-1" at 1205,4050 h100
  text "HEAT-2" at 1620,4050 h100
  text "HEATBED" at 360,4045 h100
  text "HEAT-0" at 805,4045 h100
  text "HEATBED" at 4670,4014 h120
  text "PWR IN 3" at 5550,3845 h90 r90
  text "12V - 24V" at 5615,3845 h90 r90
  text "MOTORS/LOGIC" at 4675,3689 h120
  text "PWR IN 2" at 5550,3435 h90 r90
  text "12V - 24V" at 5615,3435 h90 r90
  text "Tigershark 3D" at 2845,3180 h250
  text "Open Source 3D Printer Controller" at 2670,3060 h140
  text "PWR IN 1" at 5550,3010 h90 r90
  text "12V - 24V" at 5615,3010 h90 r90
  text "S" at 3040,2725 h175
  text "Z" at 3435,2725 h75
  text "G" at 3835,2725 h325
  text "3.3V 2A" at 4760,2150 h100
  text "5V 3A" at 5390,2150 h100
  text "3.3V" at 1945,1486 h100 r90
  text "GND" at 1545,1481 h100 r90
  text "STEP" at 1645,1481 h100 r90
  text "EN" at 1745,1481 h100 r90
  text "DIR" at 1845,1481 h100 r90
  text "GND" at 2465,1480 h100 r90
  text "STEP" at 2565,1480 h100 r90
  text "EN" at 2665,1480 h100 r90
  text "DIR" at 2765,1480 h100 r90
  text "3.3V" at 2865,1480 h100 r90
  text "GND" at 3395,1480 h100 r90
  text "STEP" at 3495,1480 h100 r90
  text "EN" at 3595,1480 h100 r90
  text "DIR" at 3695,1480 h100 r90
  text "3.3V" at 3795,1480 h100 r90
  text "GND" at 4320,1475 h100 r90
  text "STEP" at 4420,1475 h100 r90
  text "EN" at 4520,1475 h100 r90
  text "DIR" at 4620,1475 h100 r90
  text "3.3V" at 4720,1475 h100 r90
  text "GND" at 5245,1475 h100 r90
  text "STEP" at 5345,1475 h100 r90
  text "EN" at 5445,1475 h100 r90
  text "DIR" at 5545,1475 h100 r90
  text "3.3V" at 5645,1475 h100 r90
  text "ENDSTOPS" at 480,1340 h120
  text "X" at 280,1000 h300
  text "Y" at 290,575 h300
  text "STEPPER DRIVERS" at 5955,245 h120 r90
  text "Z" at 295,125 h300
  text "X" at 1290,50 h300
  text "Y" at 2215,50 h300
  text "Z" at 3150,50 h300
  text "E0" at 3925,50 h300
  text "E1" at 4850,50 h300
Bottom Overlay:
  text "Tigershark 3D" at 8805,2325 h250
  text "G" at 8040,1970 h325
  text "S" at 8420,1955 h175
  text "Z" at 8815,1955 h75
  text "Based On the Work of Ultimachine," at 8830,1825 h140
  text "Arduino, RepRap, and Synthetos.com" at 8830,1710 h140
  text "Codeveloped By Adam Vadala-Roth" at 8830,1595 h140
  text "& Johnny Russel" at 8830,1480 h140
  text "PCB Designed By Adam Vadala-Roth" at 8830,1365 h140
Mechanical 15:
  lines w10: 0,0 0,500 0,4500 6000,4500 6000,500 6000,0 0,0

## Text inside footprints (layer, text, board x,y; h text height)
FAN-1: Mechanical 16 "1" at 2657.5,4366.44 h62 r180
FAN-2: Mechanical 16 "1" at 2307.5,4366.44 h62 r180
FETS: Top Overlay "4" at 950,4193.94 h77.5; Top Overlay "3" at 750,4193.94 h77.5; Top Overlay "2" at 550,4193.94 h77.5; Top Overlay "1" at 365,4193.94 h77.5; Top Overlay "5" at 1150,4193.94 h77.5; Top Overlay "6" at 1350,4193.94 h77.5; Top Overlay "7" at 1550,4193.94 h77.5; Top Overlay "8" at 1750,4193.94 h77.5
MAX1_EndstopChannel1: Mechanical 16 "1" at 542.5,1247.5 h62 r270
MAX1_EndstopChannel2: Mechanical 16 "1" at 542.5,407.5 h62 r270
MAX1_EndstopChannel3: Mechanical 16 "1" at 542.5,827.5 h62 r270
MIN1_EndstopChannel1: Mechanical 16 "1" at 907.5,922.5 h62 r90
MIN1_EndstopChannel2: Mechanical 16 "1" at 907.5,82.5 h62 r90
MIN1_EndstopChannel3: Mechanical 16 "1" at 907.5,502.5 h62 r90
P2_ThermistorChannel1: Mechanical 16 "1" at 3797.5,4367.5 h62 r180
P2_ThermistorChannel2: Mechanical 16 "1" at 3412.5,4367.5 h62 r180
"Power Input1": Top Overlay "6" at 5695,3190 h77.5 r270; Top Overlay "5" at 5695,3390 h77.5 r270; Top Overlay "1" at 5695,4175 h77.5 r270; Top Overlay "2" at 5695,3990 h77.5 r270; Top Overlay "3" at 5695,3790 h77.5 r270; Top Overlay "4" at 5695,3590 h77.5 r270
T2_ThermocoupleChannel1: Mechanical 16 "1" at 3797.5,3812.5 h62 r180
T2_ThermocoupleChannel2: Mechanical 16 "1" at 3412.5,3812.5 h62 r180
U5: Top Overlay "TQFP 144" at 2123.74,2242.69 h49.6; Top Overlay "R" at 2368.37,2298.21 h37.2